# Altium PCB ESP32_GRBL_3Axis_E0.4_2021-05-28.pcbdoc (part 2 of 2)
Units mil, origin at the board's own origin, x right, y up, seen from the top; angles counter-clockwise.
Board outline 5724.41 x 4938.03 mil, 2 copper layers (Top Layer, Bottom Layer); 111 components, 119 nets, 457 pads, 133 vias.
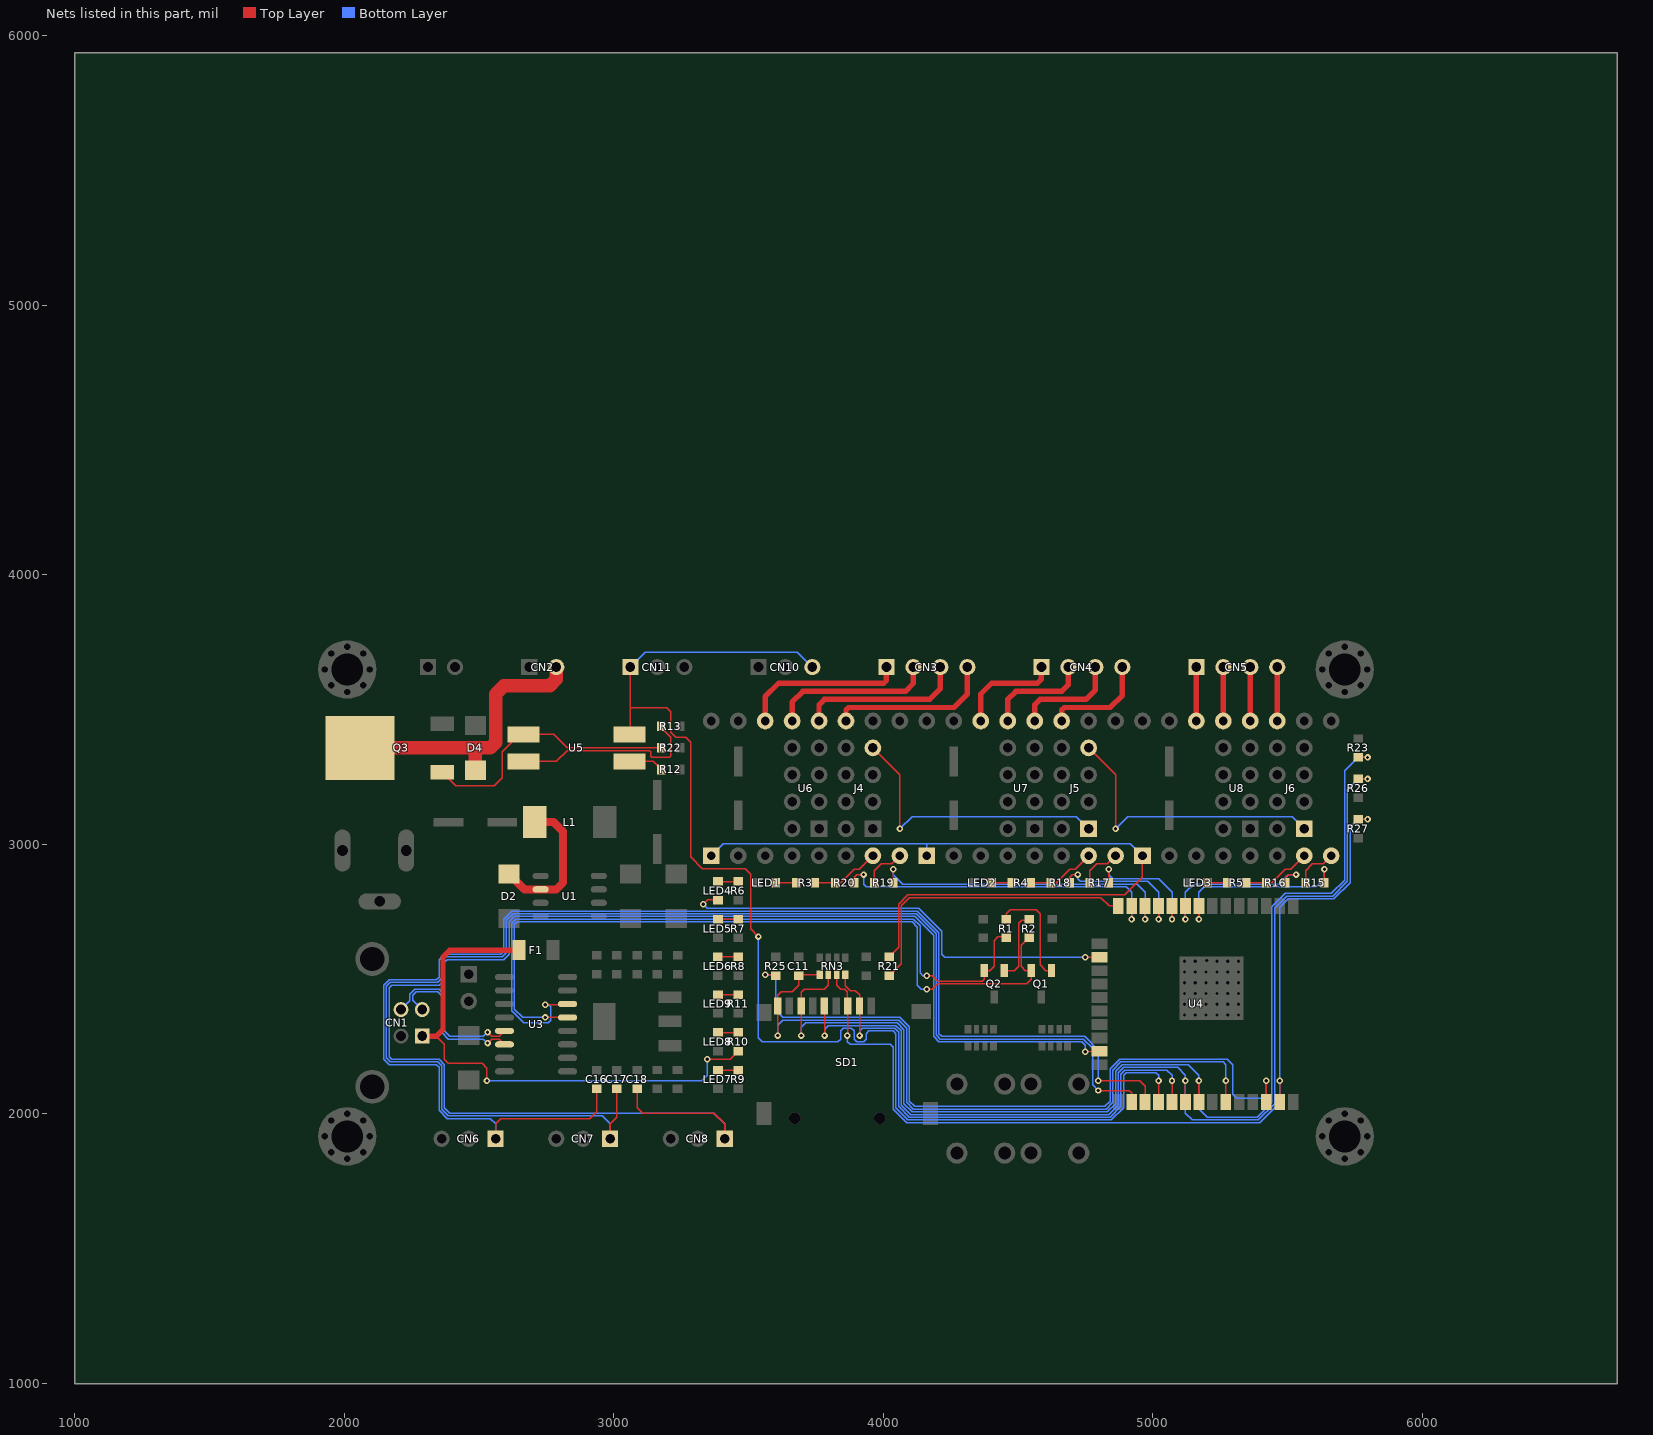
[diagram p2: the nets of this part, all layers, seen from the top]

## Via types
v1: diameter 24, hole 12, Top Layer to Bottom Layer, 133 vias

## Nets (pads, with @x,y where several pads share a name; then routed paths per layer and width w, separated by ;. In a path a pad name is that pad's centre, name@x,y a point inside that pad or via, vN(x,y) a via of type N, cw(c..) or ccw(c..) an arc to the next point about the centre after c; other vN are vias at no path point) (continued)
Q1_1: Q1.1 R1.1 | length 401.9
  Top Layer w5: R1.1@4457.21,2719.53 4457.21,2743.03 4472.21,2758.03 4567.21,2758.03 4582.21,2743.03 4582.21,2553.03 4603.01,2532.23 Q1.1@4624.61,2532.23
Q2_1: Q2.1 R2.1 | length 263.9
  Top Layer w5: Q2.1@4449.61,2532.23 4486.41,2532.23 4502.21,2548.03 4502.21,2708.03 4513.71,2719.53 R2.1@4542.21,2719.53
Q3_1: Q3.1 R22.1 U5.3 | length 987.8
  Top Layer w5: Q3.1@2364.81,3267.92 2414.61,3218.03 2557.21,3218.03 2587.21,3248.03 2587.21,3343.03 2652.21,3408.13 U5.3@2665.34,3408.1 ; U5.3@2665.34,3408.1 2777.18,3408.11 2827.21,3358.08 R22.1@3176.78,3358.08
Q3_4: CN2.2 D4.2 Q3.4 | length 1066.3
  Top Layer w50: Q3.4@2059.61,3358.03 2542.21,3358.03 2562.21,3378.03 2562.21,3558.03 2592.21,3588.03 2762.21,3588.03 2787.21,3613.03 CN2.2@2787.21,3658.03 ; D4.2@2487.21,3275.4 2487.21,3358.07
R3_1: LED1.1 R3.1 | length 75
  Top Layer w5: LED1.1@3602.21,2858.08 R3.1@3677.22,2858.08
R4_1: LED2.1 R4.1 | length 83.5
  Top Layer w5: LED2.1@4410.68,2858.13 4402.26,2858.13 LED2.1@4402.21,2858.08 R4.1@4477.22,2858.08
R5_1: LED3.1 R5.1 | length 74.6
  Top Layer w5: LED3.1@5202.21,2858.08 R5.1@5276.78,2858.08
R6_1: LED4.1 R6.1 | length 82
  Top Layer w5: LED4.1@3387.21,2861.55 3462.21,2861.55 R6.1@3462.21,2868.5
R7_2: LED5.1 R7.2 | length 82
  Top Layer w5: LED5.1@3387.21,2721.53 3462.21,2721.53 R7.2@3462.21,2728.53
R8_2: LED6.1 R8.2 | length 80.3
  Top Layer w5: LED6.1@3387.21,2583.03 R8.2@3462.24,2583.02 R8.2@3462.21,2588.33
R9_2: LED7.1 R9.2 | length 82
  Top Layer w5: LED7.1@3387.21,2161.53 3462.21,2161.53 R9.2@3462.21,2168.53
R10_2: LED8.1 R10.2 | length 82
  Top Layer w5: LED8.1@3387.21,2301.53 3462.21,2301.53 R10.2@3462.21,2308.53
R11_2: LED9.1 R11.2 | length 82
  Top Layer w5: LED9.1@3387.21,2441.53 3462.21,2441.53 R11.2@3462.21,2448.53
S$26: 
S$29: 
S$37: 
S$2434: 
S$3155: 
S$4071: 
S$4498: 
S$4514: 
S$4525: 
S$11446: 
S$11448: 
S$11450: 
S$11452: 
S$11466: 
S$11480: 
S$11482: 
S$11696: 
S$11730: 
S$11734: 
S$11736: 
S$11857: 
S$11864: 
S$11935: 
S$14727: 
S$16824: 
S$16826: 
S$16828: 
S$16830: 
S$32143: 
S$38174: 
SD_CD#: C11.2 RN3.1 SD1.9 U4.33 | length 2667
  Top Layer w5: v1@3609.21,2291.03 SD1.9@3609.21,2399.93 3609.21,2440.03 3622.21,2453.03 3662.21,2453.03 3687.21,2478.03 C11.2@3687.21,2512.63 ; C11.2@3687.21,2497.63 3687.21,2516.58 RN3.1@3764.97,2516.58 ; U4.33@5271.71,2044.03 v1@5271.71,2123.03
  Bottom Layer w5: v1@3609.21,2291.03 3609.21,2330.03 3627.21,2348.03 4057.21,2348.03 4087.21,2318.03 4087.21,2043.03 4112.21,2018.03 4827.21,2018.03 4852.21,2043.03 4852.21,2163.03 4882.21,2193.03 5262.21,2193.03 5271.71,2183.53 v1@5271.71,2123.03
  other v1: 5271.71,2123.08 3609.26,2291.08
SPI_MISO: R23.2 RN3.2 SD1.7 U4.31 | length 4373.4
  Top Layer w5: v1@3695.81,2291.03 3695.81,2399.93 3695.81,2451.63 3707.21,2463.03 3782.21,2463.03 3796.41,2477.23 RN3.2@3796.41,2516.63 ; U4.31@5171.71,2044.03 5171.71,2100.63 v1@5171.71,2123.03 ; R23.2@5762.21,3323.03 v1(5797.21,3323.03)
  Bottom Layer w5: v1@3695.81,2291.03 3695.81,2321.63 3712.21,2338.03 4052.11,2338.03 4077.21,2313.03 4077.21,2038.03 4107.21,2008.03 4832.21,2008.03 4862.21,2038.03 4862.21,2158.03 4887.21,2183.03 5132.21,2183.03 5171.71,2143.53 5171.71,2123.03 5171.71,2018.53 5202.21,1988.03 5387.21,1988.03 5442.21,2043.03 5442.21,2768.03 5492.21,2818.03 5662.21,2818.03 5712.21,2868.03 5712.21,3273.03 5762.21,3323.03 v1(5797.21,3323.03)
  other v1: 5171.71,2123.08 3695.86,2291.08
SPI_MOSI: R27.2 RN3.3 SD1.3 U4.37 | length 3587.4
  Top Layer w5: RN3.3@3827.96,2516.58 3828.01,2477.23 3842.21,2463.03 3857.21,2463.03 3867.21,2453.03 SD1.3@3867.21,2399.93 ; v1@3868.21,2290.13 SD1.3@3868.21,2399.03 ; U4.37@5471.71,2044.03 v1@5471.71,2123.03 ; R27.2@5762.21,3093.02 v1(5797.21,3093.03)
  Bottom Layer w5: v1@3867.21,2291.03 3867.21,2268.03 3877.21,2258.03 4027.21,2258.03 4037.21,2248.03 4037.21,2018.03 4087.21,1968.03 5397.21,1968.03 5471.71,2042.53 5471.71,2123.03 5471.71,2767.53 5502.21,2798.03 5672.21,2798.03 5732.21,2858.03 5732.21,3063.03 5762.21,3093.03 v1(5797.21,3093.03)
  other v1: 5471.71,2123.08 3867.16,2291.08
SPI_SCLK: R26.2 SD1.5 U4.30 | length 4017.1
  Top Layer w5: v1@3782.61,2291.03 SD1.5@3782.61,2399.93 ; U4.30@5121.71,2044.03 v1@5121.71,2123.03 ; R26.2@5762.21,3243.02 v1(5797.21,3243.03)
  Bottom Layer w5: v1@3782.61,2291.03 3782.61,2313.43 3797.21,2328.03 4047.21,2328.03 4067.21,2308.03 4067.21,2033.03 4102.21,1998.03 4837.21,1998.03 4872.21,2033.03 4872.21,2153.03 4892.21,2173.03 5092.21,2173.03 5121.71,2143.53 5121.71,2123.03 5121.71,2003.53 5147.21,1978.03 5392.21,1978.03 5452.21,2038.03 5452.21,2763.03 5497.21,2808.03 5667.21,2808.03 5722.21,2863.03 5722.21,3203.03 5762.21,3243.03 v1(5797.21,3243.03)
  other v1: 5121.71,2123.08 3782.56,2291.08
SPI_SD_CS#: RN3.4 SD1.2 U4.29 | length 1988
  Top Layer w5: RN3.4@3859.45,2516.58 3859.41,2475.83 3877.21,2458.03 3897.21,2458.03 3912.51,2442.73 3912.51,2399.93 v1@3912.51,2291.03 ; U4.29@5071.71,2044.03 v1@5071.71,2123.03
  Bottom Layer w5: v1@3912.51,2291.03 3912.51,2308.33 3922.21,2318.03 4042.21,2318.03 4057.21,2303.03 4057.21,2028.03 4097.21,1988.03 4842.21,1988.03 4882.21,2028.03 4882.21,2148.03 4897.21,2163.03 5052.21,2163.03 5071.71,2143.53 v1@5071.71,2123.03
  other v1: 5071.71,2123.08 3912.46,2291.08
SPI_TMC_CS#: R25.2 U4.36 | length 2742.6
  Top Layer w5: v1(3562.21,2516.63) 3602.21,2516.63 R25.2@3602.21,2513.03 ; U4.36@5421.71,2044.03 v1@5421.71,2123.03
  Bottom Layer w5: v1(3562.21,2516.63) 3593.61,2516.63 3602.21,2508.03 3602.21,2383.03 3627.21,2358.03 4062.21,2358.03 4097.21,2323.13 4097.21,2048.03 4117.21,2028.03 4822.21,2028.03 4842.21,2048.03 4842.21,2168.03 4877.21,2203.03 5277.21,2203.03 5297.21,2183.03 5297.21,2073.03 5312.21,2058.03 5407.21,2058.03 5421.71,2072.53 v1@5421.71,2123.03
  other v1: 5421.71,2123.08
SPINDLE_OUTPUT_PIN: CN10.3 CN11.1 U4.28 U5.2 | length 4736.6
  Top Layer w5: U5.2@3059.01,3398.03 U5.2@3059.04,3408.1 3062.21,3411.33 3062.21,3508.08 ; CN11.1@3062.21,3658.03 3062.21,3508.03 3197.21,3508.03 3212.21,3493.03 3212.21,3415.83 3230.01,3398.03 3267.31,3398.03 3286.71,3378.53 3286.71,2953.63 3329.61,2910.63 3487.51,2910.63 3508.21,2889.93 3508.21,2687.13 v1@3537.21,2658.03 ; U4.28@5021.71,2044.03 v1@5021.71,2123.03
  Bottom Layer w5: CN11.1@3062.21,3658.03 3117.21,3713.03 3682.21,3713.03 CN10.3@3737.21,3658.03 ; v1@3537.21,2658.03 3537.21,2283.03 3552.21,2268.03 3832.21,2268.03 3842.21,2278.03 3842.21,2308.03 3852.21,2318.03 3882.21,2318.03 3892.21,2308.03 3892.21,2278.03 3902.21,2268.03 3927.21,2268.03 3937.21,2278.03 3937.21,2298.03 3947.21,2308.03 4037.21,2308.03 4047.21,2298.03 4047.21,2023.03 4092.21,1978.03 4847.21,1978.03 4892.21,2023.03 4892.21,2143.03 4902.21,2153.03 5012.21,2153.03 5021.71,2143.53 v1@5021.71,2123.03
  other v1: 5021.71,2123.08 3537.21,2658.08
STAUTS_LED: LED4.2 U4.16 | length 1663.8
  Top Layer w5: v1(3332.21,2778.03) 3348.8,2794.62 LED4.2@3387.21,2794.62 ; v1(4750.21,2581.03) U4.16@4802.71,2582.03
  Bottom Layer w5: v1(3332.21,2778.03) 3347.21,2763.03 4132.21,2763.03 4217.21,2678.03 4217.21,2593.03 4229.21,2581.03 v1(4750.21,2581.03)
STEPPERS_DISABLE_PIN: R21.1 U6.1 U7.1 U8.1 | length 2963.2
  Top Layer w5: R21.1@4022.24,2583.02 4057.21,2618.03 4057.21,2778.03 4092.21,2813.03 4897.21,2813.03 4962.21,2878.03 U8.1@4962.21,2958.03
  Bottom Layer w5: U6.1@3362.21,2958.03 3407.21,3003.03 4162.21,3003.03 ; U8.1@4962.21,2958.03 4917.21,3003.03 4162.21,3003.03 ; 4162.21,3003.03 U7.1@4162.21,2958.03 4162.21,3003.03
U1_2: D2.1 L1.1 U1.2 | length 543.7
  Top Layer w30: D2.1@2612.21,2890.73 2669.91,2833.03 2729.31,2833.03 2787.21,2833.03 2812.21,2858.03 2812.21,3048.13 2777.31,3083.03 L1.1@2707.31,3083.03
U3_13: Q1.2 R2.2 U3.13 | length 2888
  Top Layer w5: v1(2746.21,2358.03) U3.13@2829.21,2358.03 ; v1(4162.21,2463.03) 4182.21,2463.03 4202.21,2483.03 4532.21,2483.03 4549.81,2500.63 4549.81,2532.23 4528.01,2532.23 4512.21,2548.03 4512.21,2626.63 R2.2@4542.21,2656.63
  Bottom Layer w5: v1(2746.21,2358.03) 2662.21,2358.03 2632.21,2388.03 2632.21,2703.03 2642.21,2713.03 4107.21,2713.03 4127.21,2693.03 4127.21,2478.03 4142.21,2463.03 v1(4162.21,2463.03)
U3_14: Q2.2 R1.2 U3.14 | length 2831.7
  Top Layer w5: v1@2746.21,2405.03 U3.14@2830.21,2405.03 ; v1(4162.21,2513.03) 4182.21,2513.03 4202.21,2493.03 4367.21,2493.03 4374.81,2500.63 Q2.2@4374.81,2532.28 ; Q2.2@4374.81,2532.23 4396.41,2532.23 4412.21,2548.03 4412.21,2643.03 4425.81,2656.63 R1.2@4457.21,2656.63
  Bottom Layer w5: v1@2746.21,2405.03 2760.21,2405.03 2767.21,2398.02 2767.21,2348.03 2757.21,2338.03 2667.21,2338.03 2622.21,2383.03 2622.21,2708.03 2637.21,2723.03 4112.21,2723.03 4137.21,2698.03 4137.21,2523.03 4147.21,2513.03 v1(4162.21,2513.03)
  other v1: 2746.21,2405.08
U4_8: R15.2 U4.8 | length 722
  Top Layer w5: v1(5171.71,2722.03) U4.8@5171.71,2772.03 ; R15.2@5637.21,2858.08 v1(5637.21,2908.08)
  Bottom Layer w5: v1(5171.71,2722.03) 5171.71,2822.53 5192.21,2843.03 5607.21,2843.03 5637.21,2873.03 v1(5637.21,2908.08)
U4_9: R16.2 U4.9 | length 652
  Top Layer w5: v1(5121.71,2722.03) U4.9@5121.71,2772.03 ; R16.2@5492.21,2858.03 5492.21,2878.03 5502.21,2888.03 v1(5532.21,2888.03)
  Bottom Layer w5: v1@5121.71,2722.33 5121.71,2822.53 5152.21,2853.03 5467.21,2853.03 5502.21,2888.03 v1(5532.21,2888.03)
U4_10: R17.2 U4.10 | length 482.7
  Top Layer w5: R17.2@4837.21,2858.08 v1(4837.21,2908.03) ; v1(5071.71,2722.03) U4.10@5071.71,2772.03
  Bottom Layer w5: v1(4837.21,2908.03) 4837.21,2888.03 4852.21,2873.03 5022.21,2873.03 5071.71,2823.53 v1(5071.71,2722.03)
U4_11: R18.2 U4.11 | length 540.6
  Top Layer w5: R18.2@4692.21,2858.03 4692.21,2878.03 4702.21,2888.03 v1(4722.21,2888.03) ; v1(5021.71,2722.03) U4.11@5021.71,2772.03
  Bottom Layer w5: v1(4722.21,2888.03) 4722.21,2873.03 4732.21,2863.03 4982.21,2863.03 5021.71,2823.53 v1(5021.71,2722.03)
U4_12: R19.2 U4.12 | length 1182.6
  Top Layer w5: R19.2@4037.21,2858.08 v1(4037.21,2908.03) ; v1(4971.71,2722.03) U4.12@4971.7,2771.92
  Bottom Layer w5: v1(4037.21,2908.03) 4037.21,2888.03 4072.21,2853.03 4942.21,2853.03 4971.71,2823.53 v1(4971.71,2722.03)
U4_13: R20.2 U4.13 | length 1252.4
  Top Layer w5: R20.2@3892.21,2858.03 3892.21,2878.03 3902.21,2888.03 v1(3927.21,2888.03) ; v1(4921.71,2722.03) U4.13@4921.71,2772.03
  Bottom Layer w5: v1(3927.21,2888.03) 3927.21,2853.03 3937.21,2843.03 4902.21,2843.03 4921.71,2823.53 v1(4921.71,2722.03)
U4_14: R21.2 U4.14 | length 1108.4
  Top Layer w5: R21.2@4022.24,2513.03 4067.21,2557.93 4067.21,2773.03 4097.21,2803.03 4807.21,2803.03 4838.21,2772.03 U4.14@4871.71,2772.03
U5_1: R12.1 U5.1 | length 130.3
  Top Layer w5: U5.1@3059.04,3308.1 3146.71,3308.13 R12.1@3176.81,3278.03
U5_4: R13.1 U5.4 | length 709.4
  Top Layer w5: U5.4@2665.34,3308.1 2787.01,3307.93 2827.21,3348.03 3132.31,3348.03 3137.21,3343.13 3137.21,3328.03 3142.21,3323.03 3207.21,3323.03 3212.21,3328.03 3212.21,3398.13 3176.81,3433.43 R13.1@3176.81,3438.03
U5V: CN1.1 F1.1 R10.1 | length 2031
  Top Layer w5: CN1.1@2289.91,2288.83 2341.51,2288.83 2372.21,2258.13 2372.21,2203.03 2387.21,2188.03 2512.21,2188.03 2530.21,2170.13 v1@2530.21,2123.03 ; v1(3347.21,2203.08) 3432.66,2203.08 R10.1@3462.21,2232.63
  Top Layer w20: CN1.1@2289.91,2288.83 2342.91,2288.83 2367.21,2313.03 2367.21,2583.03 2392.21,2608.03 F1.1@2649.21,2608.03
  Bottom Layer w5: v1@2530.21,2123.03 3327.21,2123.03 3347.21,2143.03 v1@3347.21,2203.03
  other v1: 2530.21,2123.08
U6_11: CN3.4 U6.11 | length 614.9
  Top Layer w20: U6.11@3862.21,3458.03 3862.21,3498.03 3872.21,3508.03 4262.21,3508.03 4312.21,3558.03 CN3.4@4312.21,3658.03
U6_12: CN3.3 U6.12 | length 614.9
  Top Layer w20: U6.12@3762.21,3458.03 3762.21,3518.03 3782.21,3538.03 4172.21,3538.03 4212.21,3578.03 CN3.3@4212.21,3658.03
U6_13: CN3.2 U6.13 | length 609
  Top Layer w20: U6.13@3662.21,3458.03 3662.21,3528.03 3702.21,3568.03 4082.21,3568.03 4112.21,3598.03 CN3.2@4112.21,3658.03
U6_14: CN3.1 U6.14 | length 614.9
  Top Layer w20: U6.14@3562.21,3458.03 3562.21,3548.03 3612.21,3598.03 4002.21,3598.03 4012.21,3608.03 CN3.1@4012.21,3658.03
U7_11: CN4.4 U7.11 | length 392.8
  Top Layer w20: U7.11@4662.21,3458.03 4662.21,3498.03 4672.21,3508.03 4842.21,3508.03 4887.21,3553.03 CN4.4@4887.21,3658.03
U7_12: CN4.3 U7.12 | length 392.8
  Top Layer w20: U7.12@4562.21,3458.03 4562.21,3518.03 4582.21,3538.03 4752.21,3538.03 4787.21,3573.03 CN4.3@4787.21,3658.03
U7_13: CN4.2 U7.13 | length 392.8
  Top Layer w20: U7.13@4462.21,3458.03 4462.21,3538.03 4492.21,3568.03 4662.21,3568.03 4687.21,3593.03 CN4.2@4687.21,3658.03
U7_14: CN4.1 U7.14 | length 392.8
  Top Layer w20: U7.14@4362.21,3458.03 4362.21,3558.03 4402.21,3598.03 4572.21,3598.03 4587.21,3613.03 CN4.1@4587.21,3658.03
U8_11: CN5.4 U8.11 | length 200
  Top Layer w20: U8.11@5462.21,3458.03 CN5.4@5462.21,3658.03
U8_12: CN5.3 U8.12 | length 200
  Top Layer w20: U8.12@5362.21,3458.03 CN5.3@5362.21,3658.03
U8_13: CN5.2 U8.13 | length 200
  Top Layer w20: U8.13@5262.21,3458.03 CN5.2@5262.21,3658.03
U8_14: CN5.1 U8.14 | length 200
  Top Layer w20: U8.14@5162.21,3458.03 CN5.1@5162.21,3658.03
USB_D+: CN1.3 U3.5 | length 602.2
  Top Layer w5: v1(2532.21,2303.03) 2547.21,2288.03 2575.21,2288.03 U3.5@2595.21,2308.03
  Bottom Layer w5: CN1.3@2211.21,2387.23 2244.21,2420.23 2244.21,2445.03 2262.21,2463.03 2352.21,2463.03 2372.21,2443.03 2372.21,2308.03 2392.21,2288.03 2517.21,2288.03 v1(2532.21,2303.03)
USB_D-: CN1.2 U3.6 | length 587.5
  Top Layer w5: v1(2532.21,2263.03) 2547.21,2278.03 2575.21,2278.03 U3.6@2595.21,2258.03
  Bottom Layer w5: CN1.2@2289.91,2387.23 2288.51,2387.23 2254.21,2421.53 2254.21,2440.03 2267.21,2453.03 2347.21,2453.03 2362.21,2438.03 2362.21,2302.33 2386.51,2278.03 2517.21,2278.03 v1(2532.21,2263.03)
X_DIRECTION_PIN: R19.1 U6.8 | length 162.8
  Top Layer w5: R19.1@3967.21,2858.03 3967.21,2903.03 3992.21,2928.03 4032.21,2928.03 U6.8@4062.21,2958.03
X_LIMIT_PIN: C16.2 CN6.1 U4.27 | length 5133.1
  Top Layer w5: CN6.1@2562.21,1908.03 2562.21,1963.03 2582.21,1983.03 2912.21,1983.03 2937.21,2008.03 C16.2@2937.21,2092.63 ; v1@4798.21,2123.03 4952.21,2123.03 4971.71,2103.53 U4.27@4971.71,2044.03
  Bottom Layer w5: CN6.1@2562.21,1908.03 2562.21,1963.03 2542.21,1983.03 2382.21,1983.03 2352.21,2013.03 2352.21,2173.03 2342.21,2183.03 2167.21,2183.03 2147.21,2203.03 2147.21,2478.03 2167.21,2498.03 2342.21,2498.03 2352.21,2508.03 2352.21,2573.03 2372.21,2593.03 2582.21,2593.03 2592.21,2603.03 2592.21,2723.03 2622.21,2753.03 4127.21,2753.03 4207.21,2673.03 4207.21,2298.03 4217.21,2288.03 4747.21,2288.03 4798.21,2237.03 v1@4798.21,2123.03
  other v1: 4798.21,2123.08
X_SDO: J4.7 J5.1 | length 1078.7
  Top Layer w5: J4.7@3962.21,3358.03 4062.21,3258.03 v1(4062.21,3058.03)
  Bottom Layer w5: v1(4062.21,3058.03) 4107.21,3103.03 4717.21,3103.03 J5.1@4762.21,3058.03
X_STEP_PIN: R3.2 R20.1 U6.7 | length 265
  Top Layer w5: R3.2@3747.21,2858.08 R20.1@3822.22,2858.08 R20.1@3830.72,2858.08 ; R20.1@3822.21,2858.03 3842.31,2858.03 3892.21,2908.03 3912.21,2908.03 U6.7@3962.21,2958.03
Y_DIRECTION_PIN: R17.1 U7.8 | length 162.8
  Top Layer w5: R17.1@4767.21,2858.03 4767.21,2903.03 4792.21,2928.03 4832.21,2928.03 U7.8@4862.21,2958.03
Y_DO: J5.7 J6.1 | length 1078.7
  Top Layer w5: J5.7@4762.21,3358.03 4862.21,3258.03 v1(4862.21,3058.03)
  Bottom Layer w5: v1(4862.21,3058.03) 4907.21,3103.03 5517.21,3103.03 J6.1@5562.21,3058.03
Y_LIMIT_PIN: C17.2 CN7.1 U4.26 | length 5133.4
  Top Layer w5: CN7.1@2987.21,1908.03 2987.21,1963.03 3012.21,1988.03 C17.2@3012.21,2092.63 ; v1@4798.21,2087.03 4913.21,2087.03 4921.71,2078.53 U4.26@4921.71,2044.03
  Bottom Layer w5: CN7.1@2987.21,1908.03 2987.21,1963.03 2957.21,1993.03 2387.21,1993.03 2362.21,2018.03 2362.21,2178.03 2347.21,2193.03 2172.21,2193.03 2157.21,2208.03 2157.21,2473.03 2172.21,2488.03 2347.21,2488.03 2362.21,2503.03 2362.21,2568.03 2377.21,2583.03 2587.21,2583.03 2602.21,2598.03 2602.21,2718.03 2627.21,2743.03 4122.21,2743.03 4197.21,2668.03 4197.21,2293.03 4212.21,2278.03 4742.21,2278.03 4777.21,2243.03 4777.21,2108.03 v1@4798.21,2087.03
  other v1: 4798.21,2087.08
Y_STEP_PIN: R4.2 R18.1 U7.7 | length 256.5
  Top Layer w5: R4.2@4547.21,2858.08 R18.1@4622.22,2858.08 ; R18.1@4622.21,2858.03 4642.31,2858.03 4692.21,2908.03 4712.21,2908.03 U7.7@4762.21,2958.03
Z_DIRECTION_PIN: R15.1 U8.8 | length 162.8
  Top Layer w5: R15.1@5567.21,2858.03 5567.21,2903.03 5592.21,2928.03 5632.21,2928.03 U8.8@5662.21,2958.03
Z_LIMIT_PIN: C18.2 CN8.1 U4.23 | length 5522.1
  Top Layer w5: C18.2@3087.21,2092.73 3087.21,2023.03 3107.21,2003.03 3372.21,2003.03 3412.21,1963.03 CN8.1@3412.21,1908.03 ; v1(4750.21,2231.03) U4.23@4802.71,2232.03
  Bottom Layer w5: CN8.1@3412.21,1908.03 3412.21,1963.03 3372.21,2003.03 2392.21,2003.03 2372.21,2023.03 2372.21,2183.03 2352.21,2203.03 2177.21,2203.03 2167.21,2213.03 2167.21,2468.03 2177.21,2478.03 2352.21,2478.03 2372.21,2498.03 2372.21,2563.03 2382.21,2573.03 2592.21,2573.03 2612.21,2593.03 2612.21,2713.03 2632.21,2733.03 4117.21,2733.03 4187.21,2663.03 4187.21,2288.03 4207.21,2268.03 4737.21,2268.03 4750.21,2255.03 v1(4750.21,2231.03)
Z_STEP_PIN: R5.2 R16.1 U8.7 | length 256
  Top Layer w5: R5.2@5347.65,2858.08 R16.1@5422.22,2858.08 ; R16.1@5422.21,2858.03 5442.31,2858.03 5492.21,2908.03 5512.21,2908.03 U8.7@5562.21,2958.03
pads on no net: H1.1 H2.1 H3.1 H4.1 RN1.1 RN1.2 RN1.7 RN1.8 RN2.5 RN2.6 SD1. SD1.1 SD1.8 U3.7 U3.8 U3.9 U3.10 U3.11 U3.12 U3.15 U4.4 U4.5 U4.6 U4.7 U4.17 U4.18 U4.19 U4.20 U4.21 U4.22 U4.32

## Polygon pours and split planes (outlines as drawn)
PVCC on Bottom Layer (solid): 2142.21,2888.08 2342.21,2888.08 2341.81,3239.23 5601.81,3249.23 5601.81,3459.23 2142.21,3458.08
GND on Bottom Layer (solid): 1893.7,3767.34 1893.7,1798.83 6224.41,1798.83 6224.41,3767.34
GND on Top Layer (solid): 5830.71,3767.34 5830.71,1798.83 1500,1798.83 1500,3767.34

## Keep-outs
Keep-Out Layer:
  lines w5 net S$3155: 1893.7,1916.93 ccw(c2011.81,1916.93) 2011.81,1798.82 ; 1893.7,3649.22 cw(c2011.81,3649.22) 2011.81,3767.33 ; 5712.6,1798.82 ccw(c5712.6,1916.93) 5830.71,1916.93 ; 5712.6,3767.33 cw(c5712.6,3649.22) 5830.71,3649.22

## Silkscreen, mask and mechanical layers (free items; w line width, h text height)
Top Overlay:
  lines w8 net S$14727: 3213.7,1906.82 3213.7,1912.82
  lines w8 net S$16824: 4012.21,3308.03 4112.21,3308.63 ; 4012.21,3408.03 4112.21,3408.63 ; 4812.21,3308.03 4912.21,3308.63 ; 4812.21,3408.03 4912.21,3408.63 ; 5612.21,3308.03 5712.21,3308.63 ; 5612.21,3408.03 5712.21,3408.63
  lines w8 net S$16826: 4012.21,3008.08 4112.21,3008.08 ; 4812.21,3008.08 4912.21,3008.08 ; 5612.21,3008.08 5712.21,3008.08
  lines w8 net S$16828: 4012.21,3208 4112.21,3208 ; 4812.21,3208 4912.21,3208 ; 5612.21,3208 5712.21,3208
  lines w8 net S$16830: 4012.21,3107.63 4112.21,3108.03 ; 4812.21,3107.63 4912.21,3108.03 ; 5612.21,3107.63 5712.21,3108.03
  lines w8 net S$2434: 3312.21,3508.08 3312.21,2908.08 4112.21,2908.08 ; 5712.21,3508.08 5712.21,2908.08 4912.21,2908.08 ; 4112.21,2908.08 4912.21,2908.08 ; 4112.21,2908.08 4112.21,3508.08 4112.21,2908.08 ; 4912.21,2908.08 4912.21,3508.08 4912.21,2908.08
  lines w8 net S$4071: 3312.21,3508.08 4112.21,3508.08 4912.21,3508.08 5712.21,3508.08
  text "EM" at 2582.21,3598.03 h60 r90
  text "FAN" at 2207.3,3572.34 h60 r90
  text "X AXIS" at 3907.21,3543.03 h60 r90
  text "Y AXIS" at 4482.21,3543.03 h60 r90
  text "LASER" at 3430.19,3539.1 h60 r90
  text "SERVO" at 2957.21,3538.03 h60 r90
  text "Z AXIS" at 5057.21,3538.03 h60 r90
  text "NC" at 4087.41,3322.8 h55 r90
  text "NC" at 4887.41,3322.8 h55 r90
  text "NC" at 5687.41,3322.8 h55 r90
  text "M3" at 4082.21,3223.08 h55 r90
  text "M3" at 4882.21,3223.08 h55 r90
  text "M3" at 5682.21,3223.08 h55 r90
  text "M2" at 4082.21,3123.08 h55 r91
  text "M2" at 4882.21,3123.08 h55 r91
  text "M2" at 5682.21,3123.08 h55 r91
  text "M1" at 4082.21,3023.08 h55 r90
  text "M1" at 4882.21,3023.08 h55 r90
  text "M1" at 5682.21,3023.08 h55 r90
  text "STAT" at 3353.61,2773.08 h55 r90
  text "DC  12V" at 2283.41,2754.63 h60
  text "TXD" at 3354.01,2642.59 h55 r90
  text "XBoard" at 4062.21,2508.08 h70 r1
  text "RXD" at 3353.41,2500.66 h55 r89
  text "Ver E0.4" at 4066.81,2434.28 h60
  text "UPJ" at 2404.21,2418.63 h55 r88
  text "PWR" at 3351.01,2355.58 h55 r89
  text "JLCJLCJLCJLC" at 5058.7,2271.59 h31.5
  text "USB" at 3352.21,2225.09 h55 r91
  text "RST" at 4312.21,2153.08 h60
  text "BOOT" at 4557.21,2153.08 h60
  text "SYS" at 3353.21,2086.79 h55 r90
  text "XL YL ZL" at 2582.21,2063.08 h60
Bottom Overlay:
  lines w10 net S$11446: 2562.21,2148.04 2562.21,2447.99 3262.21,2447.99 3262.21,2148.04 ; 2513.71,2478.83 2513.71,2878.83 3262.21,2878.83 3262.21,2478.83 3113.71,2478.83 2513.71,2478.83
  lines w10 net S$11448: 2513.71,2778.83 3213.71,2778.83 3262.21,2778.08
  lines w10 net S$11450: 2513.71,2678.83 3213.71,2678.83 3262.21,2678.08
  lines w10 net S$11452: 2513.71,2578.83 3262.21,2578.08
  lines w10 net S$11466: 3113.56,2478.83 3113.86,2878.83
  lines w10 net S$11480: 2913.71,2878.83 2914.01,2478.83
  lines w10 net S$11482: 2711.92,2478.78 2713.32,2478.78 2713.32,2878.78
  lines w10 net S$11696: 2912.21,2047.99 2912.21,2448.04
  lines w10 net S$11730: 2562.21,2348.04 3262.21,2348.04
  lines w10 net S$11734: 2562.21,2248.04 3262.21,2248.78
  lines w10 net S$11736: 2562.21,2148.04 3262.21,2148.04
  lines w10 net S$11857: 3014.15,2447.99 3062.21,2447.99 3062.21,2248.53 3025.57,2248.53
  lines w10 net S$11864: 2687.48,2248.17 2712.21,2248.17 2712.21,2447.99 2688.9,2447.99
  lines w10 net S$11935: 2462.21,2908.08 2462.21,3508.08 3262.21,3508.08 3262.21,2908.08 2462.21,2908.08
  lines w10 net S$32143: 2562.21,2148.04 2562.21,2047.99 3262.21,2047.99 3262.21,2148.04
  text "1B   1A   2A   2B" at 4342.21,3562.28 h50
  text "1B   1A   2A   2B" at 4917.21,3562.28 h50
  text "1B   1A   2A   2B" at 5492.21,3562.28 h50
  text "GND 5V SIN" at 3307.21,3558.88 h50
  text "SIN PWR- PWR+" at 3797.71,3558.88 h50
  text "MOS_D PWR+" at 2887.71,3556.18 h50
  text "PWR- PWR+" at 2497.71,3553.58 h50
  text "2B" at 2687.21,3317.78 h60 r270
  text "1B" at 2887.21,3317.78 h60 r270
  text "2A" at 2787.21,3313.08 h60 r270
  text "1A" at 2987.21,3313.08 h60 r270
  text "5V" at 3087.21,3312.68 h60 r270
  text "GND" at 3187.21,3253.08 h60 r270
  text "PWR-" at 2587.71,3227.68 h60 r270
  text "PWR+" at 2487.71,3211.78 h60 r270
  text "EN#" at 2487.21,3038.08 h60 r270
  text "MS1" at 2587.21,3038.08 h60 r269
  text "MS2" at 2687.21,3038.08 h60 r269
  text "MS3" at 2787.21,3038.08 h60 r270
  text "RESET#" at 2887.21,3038.08 h60 r270
  text "SLEEP#" at 2987.21,3038.08 h60 r270
  text "STEP" at 3087.21,3038.08 h60 r270
  text "DIR" at 3187.21,3038.08 h60 r270
  text "PWR-" at 2037.71,2916.03 h50 r270
  text "PWR+" at 2277.71,2916.03 h50 r270
  text "LIMIT" at 2683.71,2803.83 h50
  text "DIR" at 2858.71,2803.83 h50
  text "STEP" at 3073.71,2803.83 h50 r1
  text "AXIS" at 3243.21,2799.88 h50
  text "16" at 2638.71,2703.83 h50
  text "27" at 2838.71,2703.13 h50
  text "14" at 3043.71,2703.13 h50 r1
  text "X" at 3203.21,2703.13 h50
  text "25" at 2838.71,2603.83 h50 r1
  text "26" at 3038.71,2603.83 h50
  text "4" at 2623.71,2603.13 h50 r35
  text "Y" at 3202.51,2603.13 h50
  text "P5V" at 2437.21,2583.08 h50 r270
  text "15" at 2638.71,2503.83 h50 r1
  text "32" at 2838.71,2503.83 h50 r359
  text "33" at 3038.71,2503.83 h50
  text "Z" at 3197.41,2503.13 h50
  text "DP" at 2183.47,2433.08 h50 r270
  text "DM" at 2262.21,2433.08 h50 r270
  text "VSPI" at 3037.22,2378.04 h50 r359
  text "21" at 2662.22,2373.04 h50
  text "SD_CD" at 2887.22,2373.04 h50
  text "SD_SPI" at 3242.22,2373.04 h50
  text "5V" at 2442.21,2298.08 h50 r270
  text "13" at 2662.22,2273.04 h50 r1
  text "LED" at 2862.22,2273.04 h50
  text "12" at 3012.22,2273.04 h50
  text "M_EN" at 3237.21,2273.04 h50
  text "17" at 2737.22,2173.04 h50 r1
  text "SPINDLE" at 3197.22,2173.04 h50
  text "P5V" at 2262.21,2149.18 h50 r270
  text "GND" at 2183.47,2133.08 h50 r269
  text "TMC_CS#" at 3200.72,2074.27 h50
  text "22" at 2737.22,2072.64 h50
  text "S     G     V" at 2577.21,1958.08 h50
  text "S     G     V" at 3002.21,1958.08 h50
  text "S     G     V" at 3427.21,1958.08 h50
Bottom Solder:
  region: 5098.22,2586.75 5098.22,2346.75 5338.22,2346.75 5338.22,2586.75
Document:
  lines w5 net S$38174: 3312.21,2908.03 3312.21,3508.03 5712.21,3508.03 5712.21,2908.03 3312.21,2908.03
  lines w10 net S$4525: 1696.85,1798.82 1696.85,3767.33
  text "1oz 电流-线宽表" at 1822.21,5358.03 h80
  text "0.20A" at 1838.21,5258.03 h80
  text "0.15mm" at 2125.21,5258.03 h80
  text "5.90mil" at 2515.61,5258.03 h80
  text "0.55A" at 1838.21,5158.03 h80
  text "0.20mm" at 2131.21,5158.03 h80
  text "7.80mil" at 2514.51,5158.03 h80 r1
  text "0.80A" at 1838.21,5058.03 h80
  text "0.30mm" at 2125.21,5058.03 h80
  text "11.80mil" at 2516.31,5058.03 h80
  text "1.10A" at 1835.21,4958.03 h80
  text "0.40mm" at 2125.21,4958.03 h80
  text "15.70mil" at 2516.31,4958.03 h80
  text "1.35A" at 1835.21,4858.03 h80
  text "0.50mm" at 2131.21,4858.03 h80
  text "19.60mil" at 2512.31,4858.03 h80
  text "1.60A" at 1835.21,4758.03 h80
  text "0.60mm" at 2125.21,4758.03 h80
  text "23.60mil" at 2519,4758.03 h80
  text "2.00A" at 1837.91,4658.03 h80
  text "0.80mm" at 2125.21,4658.03 h80
  text "31.40mil" at 2519.1,4658.03 h80
  text "2.30A" at 1837.91,4558.03 h80
  text "1.00mm" at 2122.21,4558.03 h80
  text "39.30mil" at 2519.41,4558.03 h80

## Text inside footprints (layer, text, board x,y; h text height)
D5: Top Overlay "TVS" at 3192.21,2782.33 h31.5